# EAGLE board Main PCB Board Design (EAGLE 9.7.0)
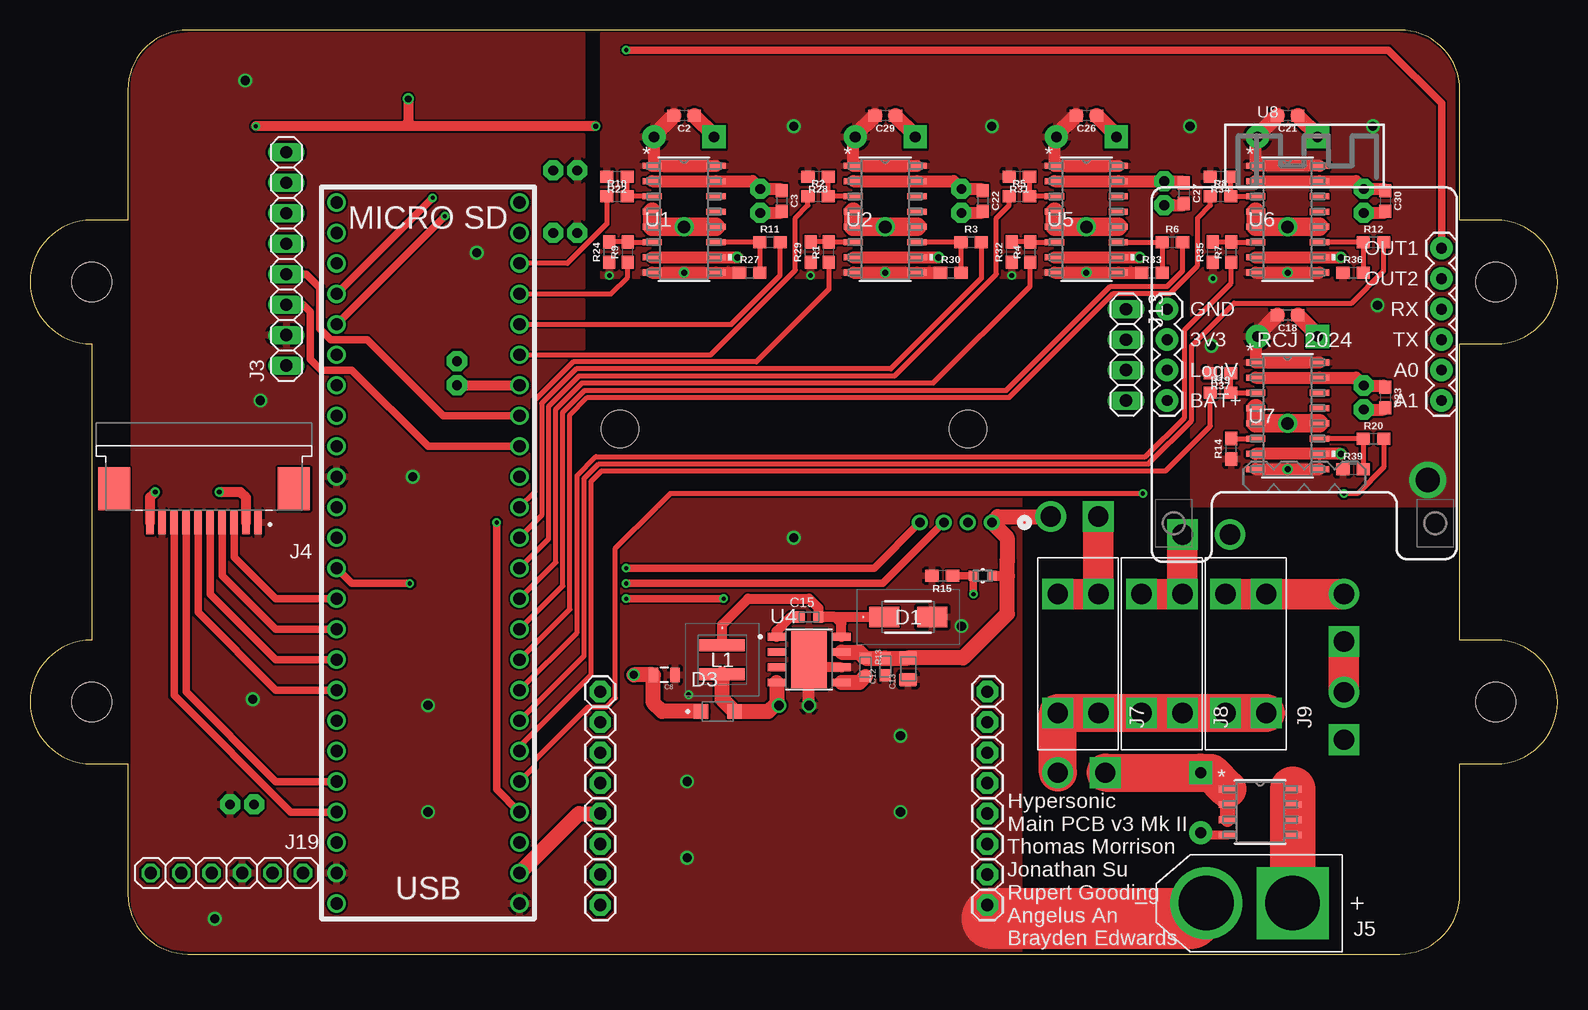
[diagram p0: board, top side]
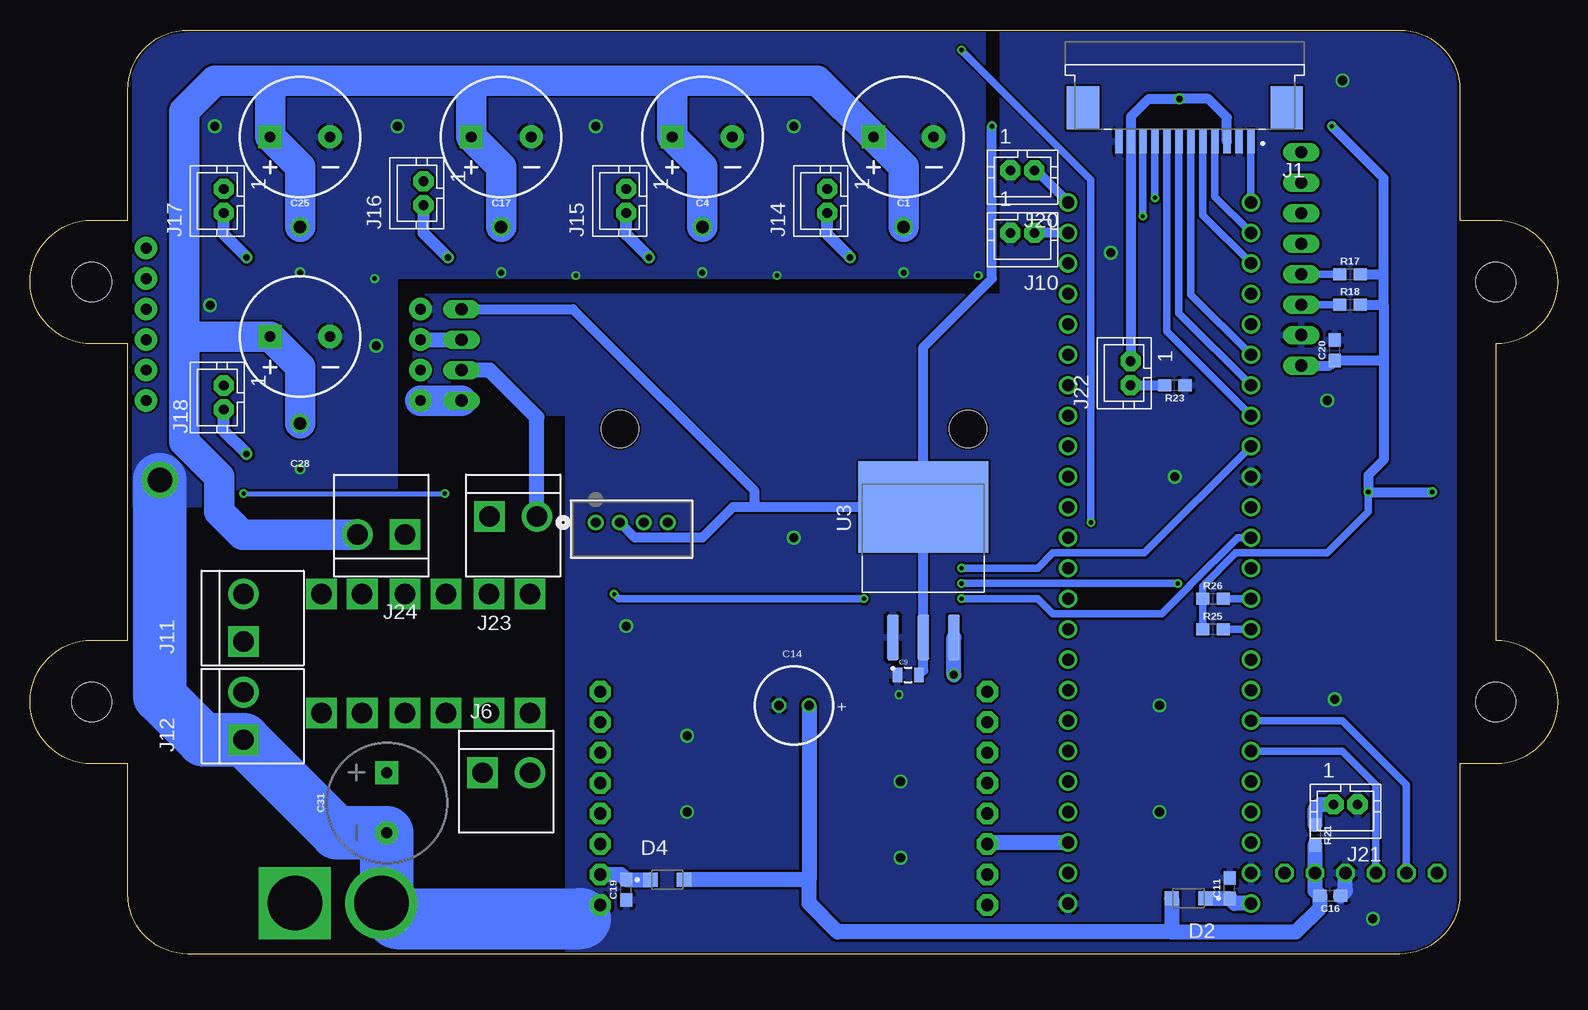
[diagram p1: board, bottom side, seen from below]

Size 127.3 x 77 mm. Coordinates in mm from the lower left corner, seen from the top.
Outline: 8.15,61.15 5.15,61.15 arc180 5.15,50.85 5.15,26.15 arc180 5.15,15.85 8.15,15.85 8.15,5 arc90 13.15,0 114.15,0 arc90 119.15,5 119.15,15.85 122.15,15.85 arc180 122.15,26.15 119.15,26.15 119.15,50.85 122.15,50.85 arc180 122.15,61.15 119.15,61.15 119.15,72 arc90 114.15,77 13.15,77 arc90 8.15,72 8.15,61.15
Copper layers (1*16): Top / Bottom
Stack-up Default Layer Stack: Top User Defined 0.035mm / Dielectric-1 User Defined 1.5mm / Bottom User Defined 0.035mm
Design rules: minimum copper width 7mil, minimum drill size 0.3mm, copper clearance wire_polygon to wire_polygon 7mil, copper clearance wire_polygon to pad_smd 7mil, copper clearance wire_polygon to via 7mil, copper clearance pad_smd to pad_smd 7mil, copper clearance pad_smd to via 7mil, copper clearance via to via 7mil, copper clearance smd to pad (same net) 7mil, copper clearance smd to via (same net) 7mil, copper clearance smd to smd (same net) 7mil, dimension clearance 7mil, via restrict clearance 0mil, restrict clearance 0mil, drill distance 7mil, keepout clearance 0mil
Holes 3.3 mm at 122.15,21 5.15,56 5.15,21 122.15,56
Holes 3.1 mm at 78.15,43.75 49.15,43.75

## Footprints (pad centres in the part's own frame; a part is rotated, then mirrored left to right if it is on the bottom)
CPOL-RADIAL-5MM-10MM-KIT = drill 0.9 pad 1.93 square: + 2.5,0 | drill 0.9 pad 1.93: - -2.5,0
0603 = smd 1.1 x 1: 1 -0.85,0; 2 0.85,0
SPARKFUN-CAPACITORS_0805 = smd 0.8 x 1.2: 1 -0.9,0; 2 0.9,0
CAPC1608X100N = smd 1.01 x 0.93: 1 -0.709,0; 2 0.709,0
CAPC2012X145N = smd 1.11 x 1.47: 1 -0.9,0; 2 0.9,0
WCAP-ATG5_6.3X11(DXL) = drill 0.8: 1 1.25,0; 2 -1.25,0
CAPC1608X90N = smd 0.92 x 0.97: 1 -0.775,0; 2 0.775,0
CPOL-RADIAL-5MM-10MM-NS = drill 0.9 pad 1.93 square: + 2.5,0 | drill 0.9 pad 1.93: - -2.5,0
SDT5A60SA13 = smd 2.5 x 1.7: 1 -2,0; 2 2,0
DIO_PMEG1030EH,115 = smd 1.2 x 1.2: 1 -1.4,0; 2 1.4,0
TE_1-84953-2 = smd 0.61 x 2: 1 -5.5,0; 2 -4.5,0; 3 -3.5,0; 4 -2.5,0; 5 -1.5,0; 6 -0.5,0; 7 0.5,0; 8 1.5,0; 9 2.5,0; 10 3.5,0; 11 4.5,0; 12 5.5,0 | smd 2.68 x 3.6: S1 -8.49,-2.8; S2 8.49,-2.8
CONN4_B4B-PH_JST = drill 0.813 pad 1.321: 1 0,0; 2 2,0; 3 4,0; 4 6,0
1X08 = drill 1.016 long: 1 -8.89,0; 2 -6.35,0; 3 -3.81,0; 4 -1.27,0; 5 1.27,0; 6 3.81,0; 7 6.35,0; 8 8.89,0
TE_1-84953-0 = smd 0.61 x 2: 1 -4.5,0; 2 -3.5,0; 3 -2.5,0; 4 -1.5,0; 5 -0.5,0; 6 0.5,0; 7 1.5,0; 8 2.5,0; 9 3.5,0; 10 4.5,0 | smd 2.68 x 3.6: S1 -7.49,-2.8; S2 7.49,-2.8
AMASS_XT60-M = drill 4.55 pad 6: N 3.6,0 | drill 4.55 pad 6 square: P -3.6,0
B2P-VH = drill 1.7 square: 1 -1.98,0 | drill 1.7: 2 1.98,0
3568-FUSEHOLDER = drill 1.702 square: 1 0,3.404; 2 0,0; 3 9.906,0; 4 9.906,3.404
JST-PH2 = drill 0.813 pad 1.676 octagon: 1 1,0; 2 -1,0
1X04 = drill 1.016 long: 1 -3.81,0; 2 -1.27,0; 3 1.27,0; 4 3.81,0
1X06 = drill 1.016 octagon: 1 -6.35,0; 2 -3.81,0; 3 -1.27,0; 4 1.27,0; 5 3.81,0; 6 6.35,0
PA5431103NLT = smd 3.8 x 1: 1 0,1.2; 2 0,-1.2
SOIC_3DY-T1-GE3_VIS = smd 1.46 x 0.559: 1 -2.724,1.905; 2 -2.724,0.635; 3 -2.724,-0.635; 4 -2.724,-1.905; 5 2.724,-1.905; 6 2.724,-0.635; 7 2.724,0.635; 8 2.724,1.905
RESC1508X55N = smd 0.9 x 0.97: 1 -0.76,0; 2 0.76,0
0603@1 = smd 1.1 x 1: 1 -0.85,0; 2 0.85,0
RC0603N_YAG = smd 0.762 x 0.813: 1 -0.775,0; 2 0.775,0
VNH7070-ASTR = smd 1.6 x 0.508: 1 -2.654,4.445; 2 -2.654,3.175; 3 -2.654,1.905; 4 -2.654,0.635; 5 -2.654,-0.635; 6 -2.654,-1.905; 7 -2.654,-3.175; 8 -2.654,-4.445; 9 2.654,-4.445; 10 2.654,-3.175; 11 2.654,-1.905; 12 2.654,-0.635; 13 2.654,0.635; 14 2.654,1.905; 15 2.654,3.175; 16 2.654,4.445
TO254P1524X483-4N = smd 3.79 x 0.99: 1 -6.4,2.54; 2 -6.4,0; 3 -6.4,-2.54 | smd 7.62 x 10.84: 4 4.48,0
VREG_LM5017MR/NOPB = smd 1.55 x 0.6: 1 -2.7,1.905; 2 -2.7,0.635; 3 -2.7,-0.635; 4 -2.7,-1.905; 5 2.7,-1.905; 6 2.7,-0.635; 7 2.7,0.635; 8 2.7,1.905 | smd 2.95 x 4.9: 9 0,0
RCJ-COM-2024 = drill 0.9 pad 1.88: +3V3 -11.43,0; A0 11.43,-2.54; A1 11.43,-5.08; GND -11.43,2.54; OUT1 11.43,7.62; OUT2 11.43,5.08; RX 11.43,2.54; TX 11.43,0; VBAT -11.43,-5.08; VLOG -11.43,-2.54
OPENMV3 = drill 1.016 pad 1.778 octagon: 11 1.651,19.304; 12 1.651,16.764; 13 1.651,14.224; 14 1.651,11.684; 15 1.651,9.144; 16 1.651,6.604; 17 1.651,4.064; 18 1.651,1.524; 21 33.909,19.304; 22 33.909,16.764; 23 33.909,14.224; 24 33.909,11.684; 25 33.909,9.144; 26 33.909,6.604; 27 33.909,4.064; 28 33.909,1.524
TEENSY4.1 = drill 1.016: P$1 -11.43,-2.54; P$2 -8.89,-2.54; P$3 -6.35,-2.54; P$4 -3.81,-2.54; P$5 -1.27,-2.54; P$6 1.27,-2.54; P$7 3.81,-2.54; P$8 6.35,-2.54; P$9 8.89,-2.54; P$10 11.43,-2.54; P$11 13.97,-2.54; P$12 16.51,-2.54; P$13 19.05,-2.54; P$14 19.05,12.7; P$15 16.51,12.7; P$16 13.97,12.7; P$17 11.43,12.7; P$18 8.89,12.7; P$19 6.35,12.7; P$20 3.81,12.7; P$21 1.27,12.7; P$22 -1.27,12.7; P$23 -3.81,12.7; P$24 -6.35,12.7; P$25 24.13,-2.54; P$26 26.67,-2.54; P$27 29.21,-2.54; P$28 31.75,-2.54; P$29 34.29,-2.54; P$30 36.83,-2.54; P$31 39.37,-2.54; P$32 41.91,-2.54; P$33 44.45,-2.54; P$34 44.45,12.7; P$35 41.91,12.7; P$36 39.37,12.7; P$37 36.83,12.7; P$38 34.29,12.7; P$39 31.75,12.7; P$40 29.21,12.7; P$41 26.67,12.7; P$42 24.13,12.7; P$53 -13.97,-2.54; P$54 21.59,-2.54; P$55 -13.97,12.7; P$56 -11.43,12.7; P$57 -8.89,12.7; P$58 21.59,12.7

## Placement (x,y rotation side)
C1  470 µf  [CPOL-RADIAL-5MM-10MM-KIT]  54.51,68.09 180 bottom
C2  0.1 µF  [0603]  54.51,69.87 180 top
C3  0.1 µF  [0603]  62.63,62.76 270 top
C4  470 µf  [CPOL-RADIAL-5MM-10MM-KIT]  71.27,68.09 180 bottom
C8  10 µF  [SPARKFUN-CAPACITORS_0805]  52.85,23.26 180 top
C9  10 µF  [SPARKFUN-CAPACITORS_0805]  54.12,23.26 0 bottom
C11  0.1uF  [0603]  27.33,5.48 90 bottom
C12  6.8 µF  [CAPC1608X100N]  71.27,23.95 90 top
C13  22 µF 25V  [CAPC2012X145N]  73.17,23.77 90 top
C14  120 µF 25V  [WCAP-ATG5_6.3X11(DXL)]  63.65,20.72 0 bottom
C15  10 nF  [CAPC1608X90N]  64.92,28.09 0 top
C16  0.1uF  [0603]  18.95,4.84 180 bottom
C17  470 µf  [CPOL-RADIAL-5MM-10MM-KIT]  88.03,68.09 180 bottom
C18  0.1 µF  [0603]  104.8,53.23 180 top
C19  0.1 µF  [0603]  77.62,5.35 90 bottom
C20  0.1 µF  [0603]  18.56,50.31 90 bottom
C21  0.1 µF  [0603]  104.8,69.87 180 top
C22  0.1 µF  [0603]  79.4,62.76 270 top
C23  0.1 µF  [0603]  112.93,46.37 270 top
C25  470 µf  [CPOL-RADIAL-5MM-10MM-KIT]  104.8,68.09 180 bottom
C26  0.1 µF  [0603]  88.03,69.87 180 top
C27  0.1 µF  [0603]  96.16,63.39 270 top
C28  470 µf  [CPOL-RADIAL-5MM-10MM-KIT]  104.8,51.45 180 bottom
C29  0.1 µF  [0603]  71.27,69.87 180 top
C30  0.1 µF  [0603]  112.93,62.76 270 top
C31  1000 µF  [CPOL-RADIAL-5MM-10MM-NS]  97.56,12.59 90 bottom
D1  60V 5A  [SDT5A60SA13]  73.17,28.09 0 top
D2  10V 3A  [DIO_PMEG1030EH,115]  30.76,4.64 180 bottom
D3  10V 3A  [DIO_PMEG1030EH,115]  57.3,20.21 0 top
D4  10V 3A  [DIO_PMEG1030EH,115]  74.19,6.19 0 bottom
J1  1-84953-2  [TE_1-84953-2]  31.06,67.71 180 bottom
J2  B4B-PH-K-SCONN4_B4B-PH_JST  [CONN4_B4B-PH_JST]  80.16,35.96 0 bottom
J3  [1X08]  21.36,57.93 90 top
J4  1-84953-0  [TE_1-84953-0]  14.5,35.96 180 top
J5  XT60-M  [AMASS_XT60-M]  101.62,4.24 180 top
J6  POWER  [B2P-VH]  87.63,15.11 0 bottom
J7  LOGIC 2A  [3568-FUSEHOLDER]  89.05,20.09 90 top
J8  MOTOR 25A  [3568-FUSEHOLDER]  96.03,20.09 90 top
J9  KICKER _A  [3568-FUSEHOLDER]  103.02,20.09 90 top
J10  [JST-PH2]  44.6,60.09 180 bottom
J11  KICKER  [B2P-VH]  109.5,28.01 90 bottom
J12  BOOSTER  [B2P-VH]  109.5,19.83 90 bottom
J13  PINHD-1X04_1X04M  [1X04]  91.34,49.93 270 top
J14  [JST-PH2]  60.86,62.76 90 bottom
J15  [JST-PH2]  77.62,62.76 90 bottom
J16  [JST-PH2]  94.51,63.39 90 bottom
J17  [JST-PH2]  111.15,62.76 90 bottom
J18  [JST-PH2]  111.15,46.37 90 bottom
J19  [1X06]  16.41,6.75 180 top
J20  [JST-PH2]  44.6,65.3 180 bottom
J21  [JST-PH2]  17.68,12.46 180 bottom
J22  [JST-PH2]  35.58,48.41 90 bottom
J23  LOGIC  [B2P-VH]  87.04,36.44 0 bottom
J24  MOTOR  [B2P-VH]  98.02,34.94 180 bottom
L1  10 µH  [PA5431103NLT]  57.68,24.53 0 top
Q1  30V 25.3A  [SOIC_3DY-T1-GE3_VIS]  102.51,11.83 0 top
R1  1 kΩ  [0603]  66.57,58.49 90 top
R2  1 kΩ  [0603]  65.68,63.14 0 top
R3  1 kΩ  [0603]  78.43,59.33 0 top
R4  1 kΩ  [0603]  83.33,58.49 90 top
R5  1 kΩ  [0603]  82.45,63.14 0 top
R6  1 kΩ  [0603]  95.2,59.33 0 top
R7  1 kΩ  [0603]  100.1,58.49 90 top
R8  1 kΩ  [0603]  99.21,63.14 0 top
R9  1 kΩ  [0603]  49.81,58.49 90 top
R10  1 kΩ  [0603]  48.92,63.14 0 top
R11  1 kΩ  [0603]  61.67,59.33 0 top
R12  1 kΩ  [0603]  111.96,59.33 0 top
R13  470 kΩ  [RESC1508X55N]  69.62,23.89 270 top
R14  10 kΩ  [0603]  100.1,42.11 90 top
R15  10 kΩ  [0603@1]  76.02,31.52 180 top
R16  33 kΩ  [RC0603N_YAG]  79.4,31.52 180 top
R17  10 kΩ  [0603@1]  17.3,56.66 0 bottom
R18  10 kΩ  [0603@1]  17.3,54.12 0 bottom
R19  1 kΩ  [0603]  99.21,46.76 0 top
R20  1 kΩ  [0603]  111.96,42.95 0 top
R21  ? kΩ  [0603@1]  20.22,9.93 270 bottom
R22  10 kΩ  [0603]  48.92,64.79 180 top
R23  ? kΩ  [0603@1]  31.9,47.39 180 bottom
R24  10 kΩ  [0603]  48.28,58.49 90 top
R25  10 kΩ  [0603@1]  28.73,27.07 0 bottom
R26  10 kΩ  [0603@1]  28.73,29.61 0 bottom
R27  10 kΩ  [0603]  59.97,56.79 0 top
R28  10 kΩ  [0603]  65.68,64.79 180 top
R29  10 kΩ  [0603]  65.05,58.49 90 top
R30  10 kΩ  [0603]  76.73,56.79 0 top
R31  10 kΩ  [0603]  82.45,64.79 180 top
R32  10 kΩ  [0603]  81.81,58.49 90 top
R33  10 kΩ  [0603]  93.5,56.79 0 top
R34  10 kΩ  [0603]  99.21,64.79 180 top
R35  10 kΩ  [0603]  98.57,58.49 90 top
R36  10 kΩ  [0603]  110.26,56.79 0 top
R37  10 kΩ  [0603]  99.21,48.41 180 top
R39  10 kΩ  [0603]  110.26,40.41 0 top
U1  VNH7070-ASTR  [VNH7070-ASTR]  54.51,61.23 0 top
U2  VNH7070-ASTR  [VNH7070-ASTR]  71.27,61.23 0 top
U3  LM1084IS-3.3/NOPB  [TO254P1524X483-4N]  52.85,32.78 90 bottom
U4  LM22676MRX-5.0/NOPB  [VREG_LM5017MR/NOPB]  64.92,24.53 0 top
U5  VNH7070-ASTR  [VNH7070-ASTR]  88.03,61.23 0 top
U6  VNH7070-ASTR  [VNH7070-ASTR]  104.8,61.23 0 top
U7  VNH7070-ASTR  [VNH7070-ASTR]  104.8,44.85 0 top
U8  RCJ-COM-2024  [RCJ-COM-2024]  106.19,51.2 0 top
U9  OPENMV3  [OPENMV3]  45.87,2.56 0 top
U$4  TEENSY4.1  [TEENSY4.1]  38.25,18.18 90 top

## Library data of the parts
C1 C4 C17 C25 C28 = SparkFun-Capacitors; PROD_ID: CAP-09538
C2 C3 C18-C23 C26 C27 C29 C30 = SparkFun-Capacitors; PROD_ID: CAP-08390
C8 C9 = Capacitors
C11 C16 = SparkFun-Capacitors; PROD_ID: CAP-00810
C12 = 6
C13 = 22 µF 25V Capacitor; A_MAX: 1.45; A_MIN: 1.45; A_NOM: 1.45; D_MAX: 2.2; D_MIN: 1.8; D_NOM: 2.0; E_MAX: 1.45; E_MIN: 1.05; E_NOM: 1.25; L1_MAX: 0.7; L1_MIN: 0.2; L1_NOM: 0.5; L_MAX: 0.7; L_MIN: 0.2; L_NOM: 0.5; MANUFACTURER: Samsung Electro-Mechanics; STANDARD: IPC 7351B
C14 = 120 µF 25V Capacitor; CHECK_PRICES: https://www.snapeda.com/parts/860020473009/W%25C3%25BCrth+Elektronik+Midcom/view-part/?ref=eda; DESCRIPTION: CAP ALUM 120UF 20% 25V RADIAL TH; DIGIKEY_PART_NUMBER: 732-8826-1-ND; MF: Würth Elektronik; MP: 860020473009; PACKAGE: Radial Würth Elektronik; SNAPEDA_LINK: https://www.snapeda.com/parts/860020473009/W%25C3%25BCrth+Elektronik+Midcom/view-part/?ref=snap
C15 = 10 nF 50V Capacitor; CHECK_PRICES: https://www.snapeda.com/parts/C0603C103K5RACTU/KEMET/view-part/?ref=eda; DESCRIPTION: Capacitor, Ceramic, .010uF, 10%, 50V | KEMET C0603C103K5RACTU; DIGIKEY_PART_NUMBER: 399-C0603C103K5RACTUCT-ND; MF: KEMET; MP: C0603C103K5RACTU; PACKAGE: 603-2 KEMET; SNAPEDA_LINK: https://www.snapeda.com/parts/C0603C103K5RACTU/KEMET/view-part/?ref=snap
C31 = SparkFun-Capacitors
D1 = 60V 5A Schottky Diode; DESCRIPTION: Diode 60 V 5A Surface Mount SMA; HEIGHT: 2.4mm; MANUFACTURER_NAME: Diodes Incorporated; MANUFACTURER_PART_NUMBER: SDT5A60SA-13; MOUSER_PART_NUMBER: 621-SDT5A60SA-13; MOUSER_PRICE-STOCK: https://www.mouser.co.uk/ProductDetail/Diodes-Incorporated/SDT5A60SA-13?qs=P1JMDcb91o7cQQHTZbkN%2Fw%3D%3D
D2-D4 = 10V 3A Schottky Diode; AVAILABILITY: In Stock; CHECK_PRICES: https://www.snapeda.com/parts/PMEG1030EH,115/Nexperia/view-part/?ref=eda; DESCRIPTION: Diode Schottky 10 V 3A (DC) Surface Mount SOD-123F; MF: Nexperia; MP: PMEG1030EH,115; PACKAGE: SOD123F-2 Nexperia USA Inc.; PRICE: None; SNAPEDA_LINK: https://www.snapeda.com/parts/PMEG1030EH,115/Nexperia/view-part/?ref=snap
J1 = real 12p ffc connector; MANUFACTURER: TE Connectivity; MAXIMUM_PACKAGE_HEIGHT: 2.74 mm; PARTREV: A4; STANDARD: Manufacturer Recommendations
J2 = 4p kicker thing; COPYRIGHT: Copyright (C) 2026 Ultra Librarian. All rights reserved.; MANUFACTURER_NAME: JST; MANUFACTURER_PART_NUMBER: B4B-PH-K-S; TYPE: Headers, Male Pins
J3 = pinhead
J4 = 1-84953-0; MANUFACTURER: TE Connectivity; MAXIMUM_PACKAGE_HEIGHT: 2.74 mm; PARTREV: A4; STANDARD: Manufacturer Recommendations
J5 = XT60-M; MANUFACTURER: AMASS; MAXIMUM_PACKAGE_HEIGHT: 16.00 mm; PARTREV: V1.2; STANDARD: IPC 7351B
J6 J11 J12 J23 J24 = JST-VH
J7-J9 = ROBO
J10 J14-J18 J20-J22 = jst-ph
J13 = Tinkercad
J19 = adafruit
L1 = 10 µH 3; DESCRIPTION: Power Inductors - SMD IND Composite 4040; HEIGHT: 4.1mm; MANUFACTURER_NAME: PULSE; MANUFACTURER_PART_NUMBER: PA5431.103NLT
Q1 = weird 30V 25; COPYRIGHT: Copyright (C) 2025 Ultra Librarian. All rights reserved.; DATASHEET: https://www.vishay.com/doc?63242; DESCRIPTION: P-CHANNEL 30-V (D-S) MOSFET; MANUFACTURER_NAME: Vishay; MANUFACTURER_PART_NUMBER: SI4143DY-T1-GE3
R1-R12 R14 R19 R20 R22 R24 R27-R37 R39 = SparkFun-Resistors; PROD_ID: RES-15715
R13 = 470 kΩ Resistor
R15 R17 R18 R21 R23 R25 R26 = SparkFun-Resistors; PROD_ID: RES-07856
R16 = 33k ohm resistor; COPYRIGHT: Copyright (C) 2026 Ultra Librarian. All rights reserved.; MANUFACTURER_NAME: Yageo; MANUFACTURER_PART_NUMBER: RC0603FR-0733KL
U1 U2 U5-U7 = VNH7070-ASTR; MANUFACTURER_PART_NUMBER: L6725; VENDOR: STMicroelectronics
U3 = Linear 3; AVAILABILITY: In Stock; CHECK_PRICES: https://www.snapeda.com/parts/LM1084IS-3.3/NOPB/Texas+Instruments/view-part/?ref=eda; DESCRIPTION: 5.5-A, 29-V, linear voltage regulator; MF: Texas Instruments; MP: LM1084IS-3.3/NOPB; PACKAGE: TO263-3 Texas Instruments; PRICE: None; SNAPEDA_LINK: https://www.snapeda.com/parts/LM1084IS-3.3/NOPB/Texas+Instruments/view-part/?ref=snap
U4 = LM22676MRX-5.0_NOPB
U8 = RCJ-COM 2024 eagle
U9 = OpenMV
U$4 = Teensy 4

## Nets
3.3V: C9.2 C20.1 J1.3 J1.11 J2.2 J3.1 J4.2 J4.10 J13.1 J22.1 R17.2 R18.2 R25.1 R26.1 U3.2 U3.4
5V: C14.1 C16.2 D2.2 D3.2 D4.2 J19.2 L1.2 R21.2 U4.4
BL_INA: R5.1 U$4.P$11
BL_INB: R4.1 U$4.P$10
BL_OUTA: C27.1 J16.1 U5.2 U5.15
BL_OUTB: C27.2 J16.2 U5.7 U5.10
BL_PWM: R6.2 U$4.P$9
BNO_SCL: J3.3 R18.1 U$4.P$25
BNO_SDA: J3.4 R17.1 U$4.P$26
BR_INA: R8.1 U$4.P$8
BR_INB: R7.1 U$4.P$7
BR_OUTA: C30.1 J17.1 U6.2 U6.15
BR_OUTB: C30.2 J17.2 U6.7 U6.10
BR_PWM: R12.2 U$4.P$6
BT_RX: J19.5 U$4.P$21
BT_TX: J19.4 U$4.P$22
CAM_RX: U9.16 U$4.P$2
CAM_TX: U9.15 U$4.P$1
COM_OUT1: U8.OUT1 U$4.P$3
DR_INA: R19.1 U$4.P$5
DR_OUTA: C23.1 J18.1 U7.2 U7.15
DR_OUTB: C23.2 J18.2 U7.7 U7.10
DR_PWM: R20.2 U$4.P$4
FL_INA: R10.1 U$4.P$31
FL_INB: R9.1 U$4.P$30
FL_OUTA: C3.1 J14.1 U1.2 U1.15
FL_OUTB: C3.2 J14.2 U1.7 U1.10
FL_PWM: R11.2 U$4.P$29
FR_INA: R2.1 U$4.P$28
FR_INB: R1.1 U$4.P$13
FR_OUTA: C22.1 J15.1 U2.2 U2.15
FR_OUTB: C22.2 J15.2 U2.7 U2.10
FR_PWM: R3.2 U$4.P$12
GND: C1.- C2.2 C4.- C8.1 C9.1 C11.2 C12.1 C13.1 C14.2 C16.1 C17.- C18.2 C19.1 C20.2 C21.2 C25.- C26.2 C28.- C29.2 C31.- D1.2 J1.2 J1.12 J3.2 J4.1 J4.9 J5.N J10.1 J12.1 J19.3 J20.1 J21.2 Q1.4 R14.1 R15.2 R22.2 R23.1 R24.1 R27.1 R28.2 R29.1 R30.1 R31.2 R32.1 R33.1 R34.2 R35.1 R36.1 R37.2 R39.1 U1.1 U1.8 U1.9 U1.16 U2.1 U2.8 U2.9 U2.16 U3.1 U4.6 U4.9 U5.1 U5.8 U5.9 U5.16 U6.1 U6.8 U6.9 U6.16 U7.1 U7.8 U7.9 U7.16 U8.GND U9.28 U$4.P$53 U$4.P$56 U$4.P$58
KICK_A: J2.4 U$4.P$42
KICK_D: J2.3 U$4.P$16
LDR: J22.2 R23.2 U$4.P$27
LED_PWM: J1.1 U$4.P$34
LOGIC_VCC: C12.2 C13.2 J2.1 J13.3 J23.2 R13.1 R16.1 U4.7
LRF_1: J4.5 U$4.P$19
LRF_2: J4.6 U$4.P$20
LRF_3: J4.7 U$4.P$23
LRF_4: J4.8 U$4.P$24
LRF_SCL: J4.3 R26.2 U$4.P$17
LRF_SDA: J4.4 R25.2 U$4.P$18
MOTOR_VCC: C1.+ C2.1 C4.+ C17.+ C18.1 C21.1 C25.+ C26.1 C28.+ C29.1 J24.2 U1.4 U1.5 U1.12 U2.4 U2.5 U2.12 U5.4 U5.5 U5.12 U6.4 U6.5 U6.12 U7.4 U7.5 U7.12
MPLS1: J1.10 U$4.P$38
MPLS2: J1.9 U$4.P$37
MPLS3: J1.5 U$4.P$36
MPLS4: J1.4 U$4.P$35
MPOUT: J1.8 U$4.P$41
MPOUT2: J1.7 U$4.P$40
MPOUT3: J1.6 U$4.P$39
N$1: R2.2 R28.1 U2.3
N$2: R3.1 R30.2 U2.11
N$3: C8.2 D3.1 U3.3
N$4: J6.2 J7.1 J7.2 J8.1 J8.2 J9.1 J9.2
N$5: R1.2 R29.2 U2.6
N$6: R5.2 R31.1 U5.3
N$7: R6.1 R33.2 U5.11
N$8: R4.2 R32.2 U5.6
N$9: R10.2 R22.1 U1.3
N$10: R11.1 R27.2 U1.11
N$11: R9.2 R24.2 U1.6
N$12: R8.2 R34.1 U6.3
N$13: R12.1 R36.2 U6.11
N$14: R7.2 R35.2 U6.6
N$15: C11.1 D2.1 U$4.P$55
N$17: R13.2 U4.5
N$18: C15.2 D1.1 L1.1 U4.8
N$19: C15.1 U4.1
N$20: J21.1 R21.1
N$21: C19.2 D4.1 U9.27
N$22: J5.P Q1.5 Q1.6 Q1.7 Q1.8
N$23: C31.+ J6.1 Q1.1 Q1.2 Q1.3
N$24: R19.2 R37.1 U7.3
N$25: R20.1 R39.2 U7.11
N$26: R14.2 U7.6
N$27: J9.3 J9.4 J11.2
N$28: J11.1 J12.2
N$29: J13.4 U8.VBAT
N$30: U8.OUT2
N$31: J7.3 J7.4 J23.1
N$32: J13.2 U8.+3V3
N$33: J8.3 J8.4 J24.1
S_SWITCH_1: J10.2 U$4.P$32
S_SWITCH_2: J20.2 U$4.P$33
V_READ: R15.1 R16.2 U$4.P$15

## Tracks (layer width: path | path; a pad name or v marks a point on that pad's centre or on a via)
3.3V  (via drill 0.35, 0.4, 0.55)
  Top 0.813: J4.2 18,38.05 17.55,38.5 v15.77,38.5 | J4.10 10,38.06 v10.44,38.5 | v47.14,68.98 31.9,68.98 | 31.9,68.98 v18.82,68.98 | v31.52,71.27 31.52,69.36 31.9,68.98
  Bottom 0.61: v15.77,38.5 15.77,36.85 19.2,33.42 26.82,33.42 29.57,30.66 R26.1 R25.1
  Bottom 0.813: J1.3 27.56,69.72 29.11,71.27 v31.52,71.27 34.06,71.27 35.56,69.76 J1.11 35.56,49.43 J22.1 | v10.44,38.5 v15.77,38.5 15.77,39.9 14.5,41.17 14.5,49.46 | J3.1 18.99,49.03 C20.1 14.5,49.46 | C9.2 52.85,23.63 U3.2 U3.4 | U3.4 52.85,50.56 47.14,56.28 v47.14,68.98 | U3.4 52.89,37.23 66.95,37.23 | 66.95,37.23 68.73,37.23 71.27,34.69 76.89,34.69 J2.2 | J13.1 82.06,53.74 66.95,38.63 66.95,37.23 | 14.5,54.12 14.5,56.66 | 14.5,54.12 14.5,49.46 | R17.2 14.5,56.66 | R18.2 14.5,54.12 | 14.5,56.66 14.5,64.66 v18.82,68.98
5V
  Top 1.27: U4.4 62.22,20.9 | 62.22,20.9 C14.1 | 62.22,20.9 61.53,20.21 D3.2 57.68,21.23 L1.2
  Bottom 1.27: 32.16,1.84 21.82,1.84 19.8,3.87 C16.2 20.22,5.27 J19.2 R21.2 | D2.2 32.16,1.84 | 62.38,6.19 D4.2 | 62.38,6.19 62.38,20.7 C14.1 | 32.16,1.84 60.02,1.84 62.38,4.21 62.38,6.19
BL_INA
  Top 0.406: U$4.P$11 43.23,34.59 43.23,45.64 45.76,48.18 72.06,48.18 80.54,56.66 80.54,61.32 81.6,62.38 R5.1
BL_INB
  Top 0.406: U$4.P$10 43.81,32.63 43.81,45.4 46.01,47.59 75.28,47.59 83.33,55.64 R4.1
BL_OUTA
  Top 1.016: U5.2 U5.15 94.5,64.41 J16.1 96.01,64.39 C27.1
BL_OUTB  (via drill 0.55)
  Top 1.016: U5.7 U5.10 v92.48,58.06 | C27.2 95.99,62.37 95.41,62.37 95.39,62.39 J16.2
  Bottom 1.016: v92.48,58.06 94.51,60.09 J16.2
BL_PWM
  Top 0.406: U$4.P$9 44.4,30.68 44.4,45.16 46.22,46.98 81.37,46.98 90.04,55.64 94.76,55.64 96.05,56.93 R6.2
BNO_SCL
  Top 0.61: U$4.P$25 33.17,42.31 26.82,48.66 24.28,48.66 23.37,49.57 23.37,53.51 22.76,54.12 J3.3
  Bottom 0.61: J3.3 R18.1
BNO_SDA
  Top 0.61: U$4.P$26 34.44,44.85 28.09,51.2 25.06,51.2 24.15,52.11 24.15,55.51 23.01,56.66 J3.4
  Bottom 0.61: J3.4 R17.1
BR_INA
  Top 0.406: U$4.P$8 44.98,28.72 44.98,44.92 46.46,46.39 81.61,46.39 90.28,55.06 95,55.06 97.31,57.36 97.31,61.32 98.36,62.38 R8.1
BR_INB
  Top 0.406: U$4.P$7 45.59,26.79 45.59,39.87 47.16,41.44 92.96,41.44 96.21,44.69 96.21,52.01 100.1,55.9 R7.1
BR_OUTA
  Top 1.016: U6.2 U6.15 110.5,64.41 J17.1 112.78,63.76 C30.1
BR_OUTB  (via drill 0.55)
  Top 1.016: U6.7 U6.10 v109.24,58.06 | J17.2 112.78,61.76 C30.2
  Bottom 1.016: J17.2 111.15,59.96 v109.24,58.06
BR_PWM
  Top 0.406: U$4.P$6 46.17,24.84 46.17,39.63 47.4,40.85 93.2,40.85 96.8,44.45 96.8,50.69 100.35,54.25 110.13,54.25 112.81,56.93 R12.2
BT_RX
  Bottom 0.61: J19.5 12.6,14.12 17.93,19.45 U$4.P$21
BT_TX
  Bottom 0.61: J19.4 15.14,14.12 17.93,16.91 U$4.P$22
CAM_RX
  Bottom 1.27: U$4.P$2 47.39,9.29 U9.16
CAM_TX
  Top 1.27: U$4.P$1 45.74,11.7 U9.15
COM_OUT1  (via drill 0.35)
  Top 0.61: v38.88,35.96 38.88,13.73 U$4.P$3 | v49.68,75.33 113.18,75.33 117.62,70.88 U8.OUT1
  Bottom 0.61: v49.68,75.33 38.88,64.53 v38.88,35.96
DR_INA
  Top 0.406: U$4.P$5 40.79,17.29 46.76,23.26 46.76,39.39 47.64,40.27 94.63,40.27 98.36,44 R19.1
DR_OUTA
  Top 1.016: U7.2 U7.15 110.5,48.02 J18.1 112.78,47.37 C23.1
DR_OUTB  (via drill 0.55)
  Top 1.016: U7.7 U7.10 v109.24,41.67 | J18.2 112.78,45.37 C23.2
  Bottom 1.016: v109.24,41.67 111.15,43.58 J18.2
DR_PWM  (via drill 0.35)
  Top 0.406: U$4.P$4 42.06,15.64 42.06,16.15 46.5,20.59 48.05,20.59 48.79,21.34 48.79,33.82 52.21,37.24 53.34,38.37 v92.73,38.37 | R20.2 112.81,40.55 110.64,38.37 v109.5,38.37
  Bottom 0.406: v109.5,38.37 v92.73,38.37
FL_INA
  Top 0.406: R10.1 48.07,60.83 44.78,57.55 U$4.P$31
FL_INB
  Top 0.406: U$4.P$30 48.41,55.01 49.81,56.41 R9.1
FL_OUTA
  Top 1.016: U1.2 U1.15 60.2,64.41 J14.1 62.48,63.76 C3.1
FL_OUTB  (via drill 0.55)
  Top 1.016: U1.7 U1.10 v58.95,58.06 | J14.2 62.48,61.76 C3.2
  Bottom 1.016: v58.95,58.06 60.86,59.96 J14.2
FL_PWM
  Top 0.406: U$4.P$29 58.44,52.47 62.52,56.55 R11.2
FR_INA
  Top 0.406: U$4.P$28 56.73,49.93 63.78,56.98 63.78,61.32 64.83,62.38 R2.1
FR_INB
  Top 0.406: U$4.P$13 42.06,38.5 42.06,46.13 45.28,49.35 60.53,49.35 66.57,55.39 R1.1
FR_OUTA
  Top 1.016: U2.2 U2.15 76.97,64.41 J15.1 79.25,63.76 C22.1
FR_OUTB  (via drill 0.55)
  Top 1.016: U2.7 U2.10 v75.72,58.06 | J15.2 79.25,61.76 C22.2
  Bottom 1.016: v75.72,58.06 77.62,59.96 J15.2
FR_PWM
  Top 0.406: U$4.P$12 42.64,36.54 42.64,45.88 45.52,48.76 71.75,48.76 79.28,56.3 R3.2
GND  (via drill 0.38, 0.5, 0.76, 2.03)
  Top 0.762: C31.- 97.73,9.93 Q1.4
  Top 0.813: U4.6 65.55,23.89
  Top 1.016: U1.1 52.22,65.68 | 52.22,65.68 U1.16 | 52.22,65.68 52.01,65.89 52.01,68.22 | U1.8 v54.51,56.79 U1.9 R27.1 | U2.8 v71.27,56.79 U2.9 R30.1 | U5.8 v88.03,56.79 U5.9 R33.1 | U6.8 v104.8,56.79 U6.9 | U6.16 U6.1 102.14,67.94 C25.- | U5.16 U5.1 85.38,68.06 85.53,68.22 | U2.16 U2.1 68.62,68.06 68.77,68.22 | U7.8 v104.8,40.41 U7.9 | U7.16 U7.1 102.14,51.3 C28.- | 65.55,23.89 U4.9 64.9,24.51 C14.2
  Top 1.27: C28.- 102.17,51.45 C18.2 | C25.- 102.3,68.22 C21.2 | C26.2 85.53,68.22 C17.- | C29.2 68.77,68.22 C4.- | C2.2 52.01,68.22 C1.-
  Top 5.08: J5.N 96.72,2.94 80.16,2.94
  Bottom 1.27: C16.1 17.68,5.27 J19.3
  Bottom 4.445: J5.N 97.56,4.7 C31.- 101.74,10.09 J12.1 112.85,17.85 116.48,21.48 v116.48,39.52
  Bottom 5.08: J5.N 96.72,2.94 81.43,2.94
  other vias: 15.39,2.94 33.17,11.83 18.56,21.23 33.17,20.72 31.9,39.77 19.2,46.12 63.65,68.98 80.16,68.98 96.67,68.98 111.91,68.98 112.29,54.07 98.45,50.69 63.65,34.69 54.76,8.02 54.76,14.37 72.54,11.83 72.54,18.18 77.62,27.32 65.05,56.54 81.81,56.54 98.57,56.28 54.89,21.61 48.28,56.54 17.93,72.79 37.23,58.44
  pour Bottom: 118.77,37.23 96.67,37.23 96.67,56.28 47.65,56.28 47.65,77.87 118.77,77.87
  pour Top: 96.67,37.23 96.67,56.28 47.52,56.28 47.52,77.87 118.77,77.87 118.77,37.23
  pour Top: 82.7,-0.87 82.7,38.5 46.25,38.5 46.25,77.87 8.41,77.87 8.41,-0.87
  pour Bottom: 82.7,-0.87 82.7,44.85 95.4,44.85 95.4,55.01 46.5,55.01 46.5,77.87 8.41,77.87 8.41,-0.87
KICK_A  (via drill 0.35)
  Top 0.61: J2.4 70.35,32.15 v49.68,32.15
  Bottom 0.61: v49.68,32.15 43.33,32.15 42.06,33.42 34.44,33.42 U$4.P$42
KICK_D  (via drill 0.35)
  Top 0.61: J2.3 71.08,30.88 v49.68,30.88 | v31.65,30.88 26.82,30.88 U$4.P$16
  Bottom 0.61: v31.65,30.88 31.67,30.91 49.66,30.91 v49.68,30.88
LDR
  Top 0.813: J22.2 40.77,47.41 U$4.P$27
  Bottom 0.813: R23.2 32.76,47.41 J22.2
LED_PWM
  Bottom 0.61: J1.1 25.56,62.64 U$4.P$34
LOGIC_VCC
  Top 0.813: R16.1 81.44,31.52
  Top 1.27: U4.7 69.11,25.16 R13.1 C12.2 | C12.2 | C12.2 73.16,24.66 C13.2 77.76,24.67 81.44,28.35 81.44,31.52 81.44,32.76 81.43,32.77 81.43,34.69 J2.1 80.64,36.44 J23.2
  Bottom 1.27: J23.2 85.06,44.74 88.98,48.66 J13.3
LRF_1
  Top 0.61: J4.5 15,30 20.47,24.53 U$4.P$19
LRF_2
  Top 0.61: J4.6 14,28.46 20.47,21.99 U$4.P$20
LRF_3
  Top 0.61: J4.7 13,21.84 20.47,14.37 U$4.P$23
LRF_4
  Top 0.61: J4.8 12,21.57 21.74,11.83 U$4.P$24
LRF_SCL
  Top 0.61: J4.3 17,33.08 20.47,29.61 U$4.P$17
  Bottom 0.61: R26.2 U$4.P$17
LRF_SDA
  Top 0.61: J4.4 16,31.54 20.47,27.07 U$4.P$18
  Bottom 0.61: U$4.P$18 R25.2
MOTOR_VCC  (via drill 1.05)
  Top 1.27: C2.1 57.01,68.22 C1.+ | C28.+ 107.43,51.45 C18.1 | C21.1 107.3,68.22 C25.+ | C26.1 90.53,68.22 C17.+ | C29.1 73.77,68.22 C4.+
  Top 1.524: U1.4 U1.5 v54.51,60.6 U1.12 | U6.4 U6.5 v104.8,60.6 U6.12 | U7.4 U7.5 v104.8,44.22 U7.12 | U2.4 U2.5 v71.27,60.6 U2.12 | U5.4 U5.5 v88.03,60.6 U5.12
  Bottom 2.54: v54.51,60.6 54.51,65.59 C1.+ 61.7,72.79 74.66,72.79 | v104.8,60.6 104.8,65.59 C25.+ 107.3,72.32 106.83,72.79 | v88.03,60.6 88.03,65.59 C17.+ 90.53,71.9 91.42,72.79 | v71.27,60.6 71.27,65.59 C4.+ 73.77,71.9 74.66,72.79 | J24.2 109.62,34.94 111.54,36.86 111.54,39.77 114.45,42.67 114.45,50.95 | 114.45,50.95 114.45,70.25 111.91,72.79 106.83,72.79 | 74.66,72.79 91.42,72.79 | 91.42,72.79 106.83,72.79 | v104.8,44.22 104.8,48.95 C28.+ 113.94,51.45 114.45,50.95
MPLS1  (via drill 0.35)
  Top 0.61: v34.57,61.49 U$4.P$38
  Bottom 0.61: J1.10 v34.56,61.49 v34.57,61.49
MPLS2  (via drill 0.35)
  Top 0.61: v33.55,63.01 U$4.P$37
  Bottom 0.61: J1.9 33.56,63.02 v33.55,63.01
MPLS3
  Bottom 0.61: J1.5 29.56,61.56 U$4.P$36
MPLS4
  Bottom 0.61: J1.4 28.56,63.1 U$4.P$35
MPOUT
  Bottom 0.61: U$4.P$41 31.28,50.58 31.28,50.6 32.56,51.88 J1.8
MPOUT2
  Bottom 0.61: J1.7 31.56,53.4 U$4.P$40
MPOUT3
  Bottom 0.61: J1.6 30.56,54.94 U$4.P$39
N$1
  Top 0.406: U2.3 R2.2 R28.1
N$2
  Top 0.406: U2.11 R3.1 R30.2
N$3  (via drill 0.65)
  Top 1.27: D3.1 52.65,20.21 51.95,20.91 C8.2 v50.31,23.26
  Bottom 1.27: v50.31,23.26 U3.3
N$4
  Top 3.175: J6.2 J7.1 J7.2 J8.1 J8.2 J9.1 J9.2
N$5
  Top 0.406: U2.6 66.58,59.33 R1.2 R29.2
N$6
  Top 0.406: U5.3 R5.2 R31.1
N$7
  Top 0.406: R33.2 R6.1 U5.11
N$8
  Top 0.406: U5.6 83.35,59.33 R4.2 R32.2
N$9
  Top 0.406: U1.3 R10.2 R22.1
N$10
  Top 0.406: U1.11 R11.1 R27.2
N$11
  Top 0.406: R24.2 R9.2 49.82,59.33 U1.6
N$12
  Top 0.406: U6.3 R8.2 R34.1
N$13
  Top 0.406: U6.11 R12.1 R36.2
N$14
  Top 0.406: U6.6 100.11,59.33 R7.2 R35.2
N$15
  Bottom 1.27: U$4.P$55 26.91,4.21 C11.1 29.34,4.63 D2.1
N$17
  Top 1.27: U4.5 69.11,22.62 R13.2
N$18
  Top 0.813: U4.8 67.62,27.55 67.08,28.09 C15.2 | C15.2 D1.1 | L1.1 57.68,27.45 59.84,29.61 64.92,29.61 65.69,28.84 C15.2
N$19
  Top 0.813: U4.1 62.22,26.91 63.4,28.09 C15.1
N$20
  Bottom 1.27: R21.1 20.22,12.05 19.8,12.46 J21.1
N$21
  Bottom 1.27: U9.27 78.04,6.62 C19.2 75.6,6.2 D4.1
N$22
  Top 3.81: J5.P 105.22,9.91 Q1.5 Q1.6 Q1.7 Q1.8
N$23
  Top 0.762: Q1.1 Q1.2
  Top 1.27: Q1.2 Q1.3
  Top 3.175: J6.1 97.54,15.11 C31.+ 98.43,15.09 Q1.1
N$24
  Top 0.406: U7.3 R19.2 R37.1
N$25
  Top 0.406: U7.11 R20.1 R39.2
N$26
  Top 0.406: R14.2 102.13,42.96 U7.6
N$27
  Top 2.54: J9.4 J9.3 J11.2
N$28
  Top 2.54: J11.1 J12.2
N$29
  Bottom 2.54: U8.VBAT J13.4
N$31
  Top 2.54: J7.4 J7.3 89.02,30.02 J23.1
N$32
  Bottom 1.27: U8.+3V3 J13.2
N$33
  Top 2.54: J8.4 J8.3 J24.1
S_SWITCH_1
  Bottom 0.813: U$4.P$32 J10.2
S_SWITCH_2
  Bottom 0.813: U$4.P$33 43.46,65.3 J20.2
V_READ  (via drill 0.35)
  Top 0.61: R15.1 R16.2 v78.62,29.99 | v57.81,29.61 v49.68,29.61
  Bottom 0.61: v78.62,29.99 78.24,29.61 v57.81,29.61 | v49.68,29.61 43.33,29.61 42.06,28.34 33,28.34 30.68,30.66 30.68,30.67 26.66,34.69 U$4.P$15

## Text on the board
SilkscreenTop: Hypersonic / Main PCB v3 Mk II / Thomas Morrison / Jonathan Su / Rupert Gooding / Angelus An / Brayden Edwards